# Altium PCB S52最小系统.PcbDoc (part 6 of 9)
Units mm, origin at the board's own origin, x right, y up, seen from the top; angles counter-clockwise.
Board outline 152.4 x 101.6 mm, 2 copper layers (Top Layer, Bottom Layer); 29 components, 53 nets, 176 pads, 2 vias.
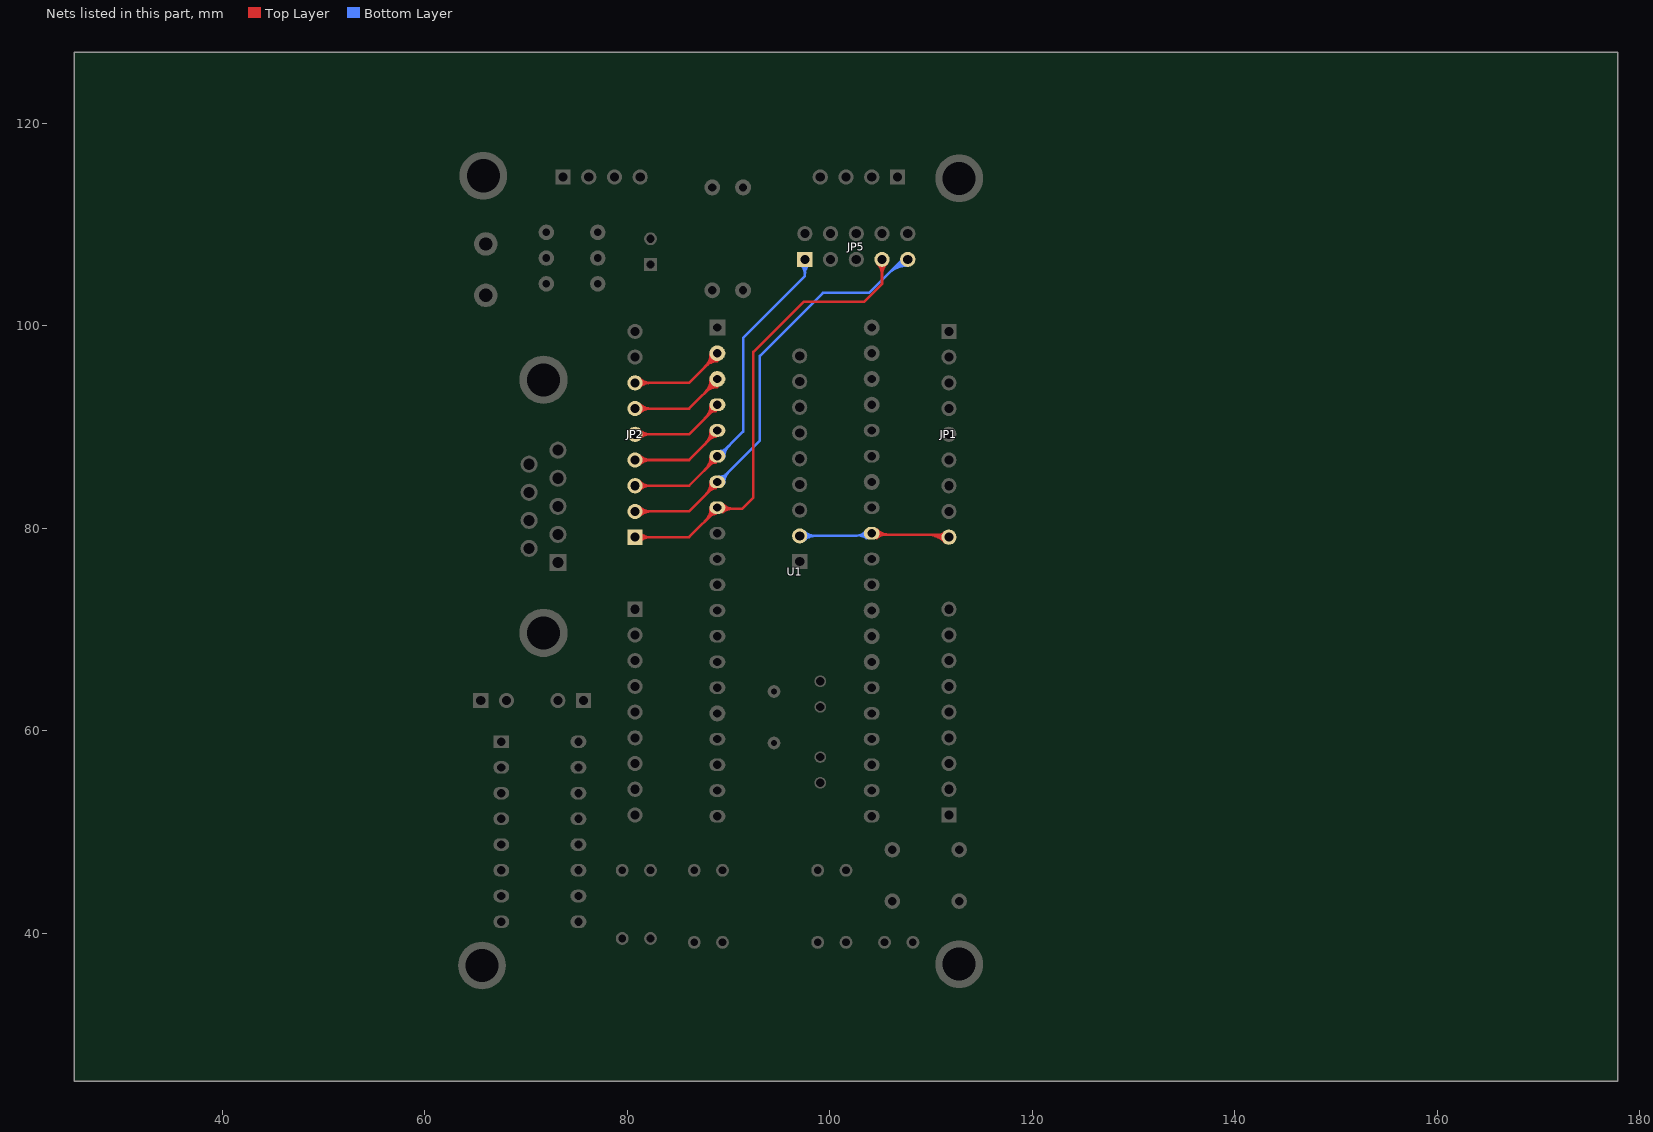
[diagram p6: the nets of this part, all layers, seen from the top]

## Via types
v1: diameter 1.27, hole 0.711, Top Layer to Bottom Layer, 2 vias

## Nets (pads, with @x,y where several pads share a name; then routed paths per layer and width w, separated by ;. In a path a pad name is that pad's centre, name@x,y a point inside that pad or via, vN(x,y) a via of type N, cw(c..) or ccw(c..) an arc to the next point about the centre after c; other vN are vias at no path point) (continued)
NetJP1_9: ?.2 JP1.9 U1.32 | length 99.6
  Top Layer w0.254: U1.32@104.136,79.374 111.507,79.374 JP1.9@111.76,79.121 ; U1.32@104.471,79.674 ccw(c105.194,80.397) 105.194,79.374 ; U1.32@104.471,79.674 ccw(c105.194,80.397) 105.194,79.374 ; U1.32@104.471,79.674 ccw(c105.194,80.397) 105.194,79.374 ; U1.32@104.471,79.674 ccw(c105.194,80.397) 105.194,79.374 ; U1.32@104.651,79.022 cw(c105.501,78.172) 105.501,79.374 ; U1.32@104.651,79.022 cw(c105.501,78.172) 105.501,79.374 ; U1.32@104.651,79.022 cw(c105.501,78.172) 105.501,79.374 ; U1.32@104.651,79.022 cw(c105.501,78.172) 105.501,79.374 ; U1.32@104.651,79.022 cw(c105.501,78.172) 105.501,79.374 ; U1.32@104.651,79.022 cw(c105.501,78.172) 105.501,79.374 ; U1.32@104.651,79.149 cw(c105.194,78.605) 105.194,79.374 ; U1.32@104.651,79.149 cw(c105.194,78.605) 105.194,79.374 ; U1.32@104.651,79.149 cw(c105.194,78.605) 105.194,79.374 ; U1.32@104.651,79.149 cw(c105.194,78.605) 105.194,79.374 ; U1.32@104.651,79.726 ccw(c105.501,80.576) 105.501,79.374 ; U1.32@104.651,79.726 ccw(c105.501,80.576) 105.501,79.374 ; U1.32@104.651,79.726 ccw(c105.501,80.576) 105.501,79.374 ; U1.32@104.651,79.726 ccw(c105.501,80.576) 105.501,79.374 ; U1.32@104.651,79.726 ccw(c105.501,80.576) 105.501,79.374 ; U1.32@104.651,79.726 ccw(c105.501,80.576) 105.501,79.374 ; U1.32@104.651,79.853 ccw(c105.807,81.01) 105.807,79.374 ; U1.32@104.651,79.853 ccw(c105.807,81.01) 105.807,79.374 ; U1.32@104.651,79.853 ccw(c105.807,81.01) 105.807,79.374 ; U1.32@104.651,79.853 ccw(c105.807,81.01) 105.807,79.374 ; 109.645,79.374 cw(c109.645,77.006) JP1.9@111.319,78.68 ; 109.645,79.374 cw(c109.645,77.006) JP1.9@111.319,78.68 ; 109.645,79.374 cw(c109.645,77.006) JP1.9@111.319,78.68 ; 109.645,79.374 cw(c109.645,77.006) JP1.9@111.319,78.68 ; 109.645,79.374 cw(c109.645,77.006) JP1.9@111.319,78.68 ; 109.645,79.374 cw(c109.645,77.006) JP1.9@111.319,78.68 ; 109.645,79.374 cw(c109.645,77.006) JP1.9@111.319,78.68 ; 109.645,79.374 cw(c109.645,77.006) JP1.9@111.319,78.68 ; 109.645,79.374 cw(c109.645,77.006) JP1.9@111.319,78.68 ; 109.645,79.374 cw(c109.645,77.006) JP1.9@111.319,78.68 ; 110.258,79.374 cw(c110.258,77.619) JP1.9@111.499,78.86 ; 110.258,79.374 cw(c110.258,77.619) JP1.9@111.499,78.86 ; 110.258,79.374 cw(c110.258,77.619) JP1.9@111.499,78.86 ; 110.258,79.374 cw(c110.258,77.619) JP1.9@111.499,78.86 ; 110.258,79.374 cw(c110.258,77.619) JP1.9@111.499,78.86 ; 110.258,79.374 cw(c110.258,77.619) JP1.9@111.499,78.86 ; 110.258,79.374 cw(c110.258,77.619) JP1.9@111.499,78.86 ; 110.258,79.374 cw(c110.258,77.619) JP1.9@111.499,78.86 ; 110.258,79.374 cw(c110.258,77.619) JP1.9@111.499,78.86 ; 110.258,79.374 cw(c110.258,77.619) JP1.9@111.499,78.86 ; 110.867,79.374 ccw(c110.867,80.014) JP1.9@111.319,79.562 ; 110.867,79.374 ccw(c110.867,80.014) JP1.9@111.319,79.562 ; 110.867,79.374 ccw(c110.867,80.014) JP1.9@111.319,79.562 ; 110.867,79.374 ccw(c110.867,80.014) JP1.9@111.319,79.562 ; 110.867,79.374 ccw(c110.867,80.014) JP1.9@111.319,79.562 ; 110.867,79.374 ccw(c110.867,80.014) JP1.9@111.319,79.562 ; 110.867,79.374 ccw(c110.867,80.014) JP1.9@111.319,79.562 ; 110.867,79.374 ccw(c110.867,80.014) JP1.9@111.319,79.562 ; 110.867,79.374 ccw(c110.867,80.014) JP1.9@111.319,79.562 ; 110.867,79.374 ccw(c110.867,80.014) JP1.9@111.319,79.562 ; 110.872,79.374 cw(c110.872,78.233) JP1.9@111.679,79.04 ; 110.872,79.374 cw(c110.872,78.233) JP1.9@111.679,79.04 ; 110.872,79.374 cw(c110.872,78.233) JP1.9@111.679,79.04 ; 110.872,79.374 cw(c110.872,78.233) JP1.9@111.679,79.04 ; 110.872,79.374 cw(c110.872,78.233) JP1.9@111.679,79.04 ; 110.872,79.374 cw(c110.872,78.233) JP1.9@111.679,79.04 ; 110.872,79.374 cw(c110.872,78.233) JP1.9@111.679,79.04 ; 110.872,79.374 cw(c110.872,78.233) JP1.9@111.679,79.04 ; 110.872,79.374 cw(c110.872,78.233) JP1.9@111.679,79.04 ; 110.872,79.374 cw(c110.872,78.233) JP1.9@111.679,79.04
  Bottom Layer w0.254: ?.2@97.028,79.248 102.467,79.248 ccw(c102.467,80.881) U1.32@103.622,79.726 ; 103.076,79.248 cw(c103.076,78.476) U1.32@103.622,79.022 ; 103.08,79.248 ccw(c103.08,80.267) U1.32@103.801,79.547 ; U1.32@104.01,79.248 U1.32@104.136,79.374 ; ?.2@97.289,78.987 cw(c97.919,78.357) 97.919,79.248 ; ?.2@97.289,78.987 cw(c97.919,78.357) 97.919,79.248 ; ?.2@97.289,78.987 cw(c97.919,78.357) 97.919,79.248 ; ?.2@97.289,78.987 cw(c97.919,78.357) 97.919,79.248 ; ?.2@97.289,79.509 ccw(c97.919,80.139) 97.919,79.248 ; ?.2@97.289,79.509 ccw(c97.919,80.139) 97.919,79.248 ; ?.2@97.289,79.509 ccw(c97.919,80.139) 97.919,79.248 ; ?.2@97.289,79.509 ccw(c97.919,80.139) 97.919,79.248 ; ?.2@97.469,78.807 cw(c98.532,77.744) 98.532,79.248 ; ?.2@97.469,78.807 cw(c98.532,77.744) 98.532,79.248 ; ?.2@97.469,78.807 cw(c98.532,77.744) 98.532,79.248 ; ?.2@97.469,78.807 cw(c98.532,77.744) 98.532,79.248 ; ?.2@97.469,79.689 ccw(c98.532,80.752) 98.532,79.248 ; ?.2@97.469,79.689 ccw(c98.532,80.752) 98.532,79.248 ; ?.2@97.469,79.689 ccw(c98.532,80.752) 98.532,79.248 ; ?.2@97.469,79.689 ccw(c98.532,80.752) 98.532,79.248
NetJP2_1: JP2.1 JP5.7 U1.8 | length 152.6
  Top Layer w0.254: JP2.1@80.772,79.121 86.103,79.121 88.896,81.914 91.312,81.914 92.456,83.058 92.456,97.409 97.409,102.362 103.378,102.362 105.156,104.14 JP5.7@105.156,106.553 ; JP2.1@81.033,78.86 cw(c81.663,78.23) 81.663,79.121 ; JP2.1@81.033,78.86 cw(c81.663,78.23) 81.663,79.121 ; JP2.1@81.033,78.86 cw(c81.663,78.23) 81.663,79.121 ; JP2.1@81.033,78.86 cw(c81.663,78.23) 81.663,79.121 ; JP2.1@81.033,78.86 cw(c81.663,78.23) 81.663,79.121 ; JP2.1@81.033,78.86 cw(c81.663,78.23) 81.663,79.121 ; JP2.1@81.033,78.86 cw(c81.663,78.23) 81.663,79.121 ; JP2.1@81.033,78.86 cw(c81.663,78.23) 81.663,79.121 ; JP2.1@81.033,78.86 cw(c81.663,78.23) 81.663,79.121 ; JP2.1@81.033,78.86 cw(c81.663,78.23) 81.663,79.121 ; JP2.1@81.033,79.382 ccw(c81.663,80.012) 81.663,79.121 ; JP2.1@81.033,79.382 ccw(c81.663,80.012) 81.663,79.121 ; JP2.1@81.033,79.382 ccw(c81.663,80.012) 81.663,79.121 ; JP2.1@81.033,79.382 ccw(c81.663,80.012) 81.663,79.121 ; JP2.1@81.033,79.382 ccw(c81.663,80.012) 81.663,79.121 ; JP2.1@81.033,79.382 ccw(c81.663,80.012) 81.663,79.121 ; JP2.1@81.033,79.382 ccw(c81.663,80.012) 81.663,79.121 ; JP2.1@81.033,79.382 ccw(c81.663,80.012) 81.663,79.121 ; JP2.1@81.033,79.382 ccw(c81.663,80.012) 81.663,79.121 ; JP2.1@81.033,79.382 ccw(c81.663,80.012) 81.663,79.121 ; JP2.1@81.213,78.68 cw(c82.276,77.617) 82.276,79.121 ; JP2.1@81.213,78.68 cw(c82.276,77.617) 82.276,79.121 ; JP2.1@81.213,78.68 cw(c82.276,77.617) 82.276,79.121 ; JP2.1@81.213,78.68 cw(c82.276,77.617) 82.276,79.121 ; JP2.1@81.213,78.68 cw(c82.276,77.617) 82.276,79.121 ; JP2.1@81.213,78.68 cw(c82.276,77.617) 82.276,79.121 ; JP2.1@81.213,78.68 cw(c82.276,77.617) 82.276,79.121 ; JP2.1@81.213,78.68 cw(c82.276,77.617) 82.276,79.121 ; JP2.1@81.213,78.68 cw(c82.276,77.617) 82.276,79.121 ; JP2.1@81.213,78.68 cw(c82.276,77.617) 82.276,79.121 ; JP2.1@81.213,79.562 ccw(c82.276,80.625) 82.276,79.121 ; JP2.1@81.213,79.562 ccw(c82.276,80.625) 82.276,79.121 ; JP2.1@81.213,79.562 ccw(c82.276,80.625) 82.276,79.121 ; JP2.1@81.213,79.562 ccw(c82.276,80.625) 82.276,79.121 ; JP2.1@81.213,79.562 ccw(c82.276,80.625) 82.276,79.121 ; JP2.1@81.213,79.562 ccw(c82.276,80.625) 82.276,79.121 ; JP2.1@81.213,79.562 ccw(c82.276,80.625) 82.276,79.121 ; JP2.1@81.213,79.562 ccw(c82.276,80.625) 82.276,79.121 ; JP2.1@81.213,79.562 ccw(c82.276,80.625) 82.276,79.121 ; JP2.1@81.213,79.562 ccw(c82.276,80.625) 82.276,79.121 ; 87.679,80.697 ccw(c86.335,82.041) U1.8@88.236,82.041 ; 87.679,80.697 ccw(c86.335,82.041) U1.8@88.236,82.041 ; 87.679,80.697 ccw(c86.335,82.041) U1.8@88.236,82.041 ; 87.679,80.697 ccw(c86.335,82.041) U1.8@88.236,82.041 ; 87.769,80.787 ccw(c86.641,81.914) U1.8@88.236,81.914 ; 87.769,80.787 ccw(c86.641,81.914) U1.8@88.236,81.914 ; 87.769,80.787 ccw(c86.641,81.914) U1.8@88.236,81.914 ; 87.769,80.787 ccw(c86.641,81.914) U1.8@88.236,81.914 ; 87.769,80.787 ccw(c86.641,81.914) U1.8@88.236,81.914 ; 87.769,80.787 ccw(c86.641,81.914) U1.8@88.236,81.914 ; 88.113,81.13 ccw(c87.202,82.041) U1.8@88.49,82.041 ; 88.113,81.13 ccw(c87.202,82.041) U1.8@88.49,82.041 ; 88.113,81.13 ccw(c87.202,82.041) U1.8@88.49,82.041 ; 88.113,81.13 ccw(c87.202,82.041) U1.8@88.49,82.041 ; 88.161,81.179 cw(c88.734,80.606) U1.8@88.734,81.416 ; 88.161,81.179 cw(c88.734,80.606) U1.8@88.734,81.416 ; 88.161,81.179 cw(c88.734,80.606) U1.8@88.734,81.416 ; 88.161,81.179 cw(c88.734,80.606) U1.8@88.734,81.416 ; 88.161,81.179 cw(c88.734,80.606) U1.8@88.734,81.416 ; 88.161,81.179 cw(c88.734,80.606) U1.8@88.734,81.416 ; 88.202,81.22 ccw(c87.509,81.914) U1.8@88.49,81.914 ; 88.202,81.22 ccw(c87.509,81.914) U1.8@88.49,81.914 ; 88.202,81.22 ccw(c87.509,81.914) U1.8@88.49,81.914 ; 88.202,81.22 ccw(c87.509,81.914) U1.8@88.49,81.914 ; 88.202,81.22 ccw(c87.509,81.914) U1.8@88.49,81.914 ; 88.202,81.22 ccw(c87.509,81.914) U1.8@88.49,81.914 ; 88.378,81.395 cw(c88.734,81.039) U1.8@88.734,81.543 ; 88.378,81.395 cw(c88.734,81.039) U1.8@88.734,81.543 ; 88.378,81.395 cw(c88.734,81.039) U1.8@88.734,81.543 ; 88.378,81.395 cw(c88.734,81.039) U1.8@88.734,81.543 ; U1.8@89.231,82.214 ccw(c89.954,82.937) 89.954,81.914 ; U1.8@89.231,82.214 ccw(c89.954,82.937) 89.954,81.914 ; U1.8@89.231,82.214 ccw(c89.954,82.937) 89.954,81.914 ; U1.8@89.231,82.214 ccw(c89.954,82.937) 89.954,81.914 ; U1.8@89.411,81.562 cw(c90.261,80.712) 90.261,81.914 ; U1.8@89.411,81.562 cw(c90.261,80.712) 90.261,81.914 ; U1.8@89.411,81.562 cw(c90.261,80.712) 90.261,81.914 ; U1.8@89.411,81.562 cw(c90.261,80.712) 90.261,81.914 ; U1.8@89.411,81.562 cw(c90.261,80.712) 90.261,81.914 ; U1.8@89.411,81.562 cw(c90.261,80.712) 90.261,81.914 ; U1.8@89.411,81.689 cw(c89.954,81.145) 89.954,81.914 ; U1.8@89.411,81.689 cw(c89.954,81.145) 89.954,81.914 ; U1.8@89.411,81.689 cw(c89.954,81.145) 89.954,81.914 ; U1.8@89.411,81.689 cw(c89.954,81.145) 89.954,81.914 ; U1.8@89.411,82.266 ccw(c90.261,83.116) 90.261,81.914 ; U1.8@89.411,82.266 ccw(c90.261,83.116) 90.261,81.914 ; U1.8@89.411,82.266 ccw(c90.261,83.116) 90.261,81.914 ; U1.8@89.411,82.266 ccw(c90.261,83.116) 90.261,81.914 ; U1.8@89.411,82.266 ccw(c90.261,83.116) 90.261,81.914 ; U1.8@89.411,82.266 ccw(c90.261,83.116) 90.261,81.914 ; U1.8@89.411,82.393 ccw(c90.567,83.55) 90.567,81.914 ; U1.8@89.411,82.393 ccw(c90.567,83.55) 90.567,81.914 ; U1.8@89.411,82.393 ccw(c90.567,83.55) 90.567,81.914 ; U1.8@89.411,82.393 ccw(c90.567,83.55) 90.567,81.914 ; JP5.7@104.715,106.112 cw(c103.652,105.049) 105.156,105.049 ; JP5.7@104.715,106.112 cw(c103.652,105.049) 105.156,105.049 ; JP5.7@104.715,106.112 cw(c103.652,105.049) 105.156,105.049 ; JP5.7@104.715,106.112 cw(c103.652,105.049) 105.156,105.049 ; JP5.7@104.895,106.292 cw(c104.265,105.662) 105.156,105.662 ; JP5.7@104.895,106.292 cw(c104.265,105.662) 105.156,105.662 ; JP5.7@104.895,106.292 cw(c104.265,105.662) 105.156,105.662 ; JP5.7@104.895,106.292 cw(c104.265,105.662) 105.156,105.662 ; JP5.7@104.943,105.967 cw(c104.833,105.664) 105.156,105.664 ; JP5.7@104.943,105.967 cw(c104.833,105.664) 105.156,105.664 ; JP5.7@104.943,105.967 cw(c104.833,105.664) 105.156,105.664 ; JP5.7@104.943,105.967 cw(c104.833,105.664) 105.156,105.664 ; JP5.7@104.943,105.967 cw(c104.833,105.664) 105.156,105.664 ; JP5.7@104.943,105.967 cw(c104.833,105.664) 105.156,105.664 ; 105.156,105.049 cw(c106.66,105.049) JP5.7@105.597,106.112 ; 105.156,105.049 cw(c106.66,105.049) JP5.7@105.597,106.112 ; 105.156,105.049 cw(c106.66,105.049) JP5.7@105.597,106.112 ; 105.156,105.049 cw(c106.66,105.049) JP5.7@105.597,106.112 ; 105.156,105.662 cw(c106.047,105.662) JP5.7@105.417,106.292 ; 105.156,105.662 cw(c106.047,105.662) JP5.7@105.417,106.292 ; 105.156,105.662 cw(c106.047,105.662) JP5.7@105.417,106.292 ; 105.156,105.662 cw(c106.047,105.662) JP5.7@105.417,106.292 ; 105.156,105.664 cw(c105.479,105.664) JP5.7@105.369,105.967 ; 105.156,105.664 cw(c105.479,105.664) JP5.7@105.369,105.967 ; 105.156,105.664 cw(c105.479,105.664) JP5.7@105.369,105.967 ; 105.156,105.664 cw(c105.479,105.664) JP5.7@105.369,105.967 ; 105.156,105.664 cw(c105.479,105.664) JP5.7@105.369,105.967 ; 105.156,105.664 cw(c105.479,105.664) JP5.7@105.369,105.967
NetJP2_2: JP2.2 JP5.9 U1.7 | length 182.8
  Top Layer w0.254: JP2.2@80.772,81.661 86.103,81.661 U1.7@88.896,84.454 ; JP2.2@81.033,81.4 cw(c81.663,80.77) 81.663,81.661 ; JP2.2@81.033,81.4 cw(c81.663,80.77) 81.663,81.661 ; JP2.2@81.033,81.4 cw(c81.663,80.77) 81.663,81.661 ; JP2.2@81.033,81.4 cw(c81.663,80.77) 81.663,81.661 ; JP2.2@81.033,81.4 cw(c81.663,80.77) 81.663,81.661 ; JP2.2@81.033,81.4 cw(c81.663,80.77) 81.663,81.661 ; JP2.2@81.033,81.4 cw(c81.663,80.77) 81.663,81.661 ; JP2.2@81.033,81.4 cw(c81.663,80.77) 81.663,81.661 ; JP2.2@81.033,81.4 cw(c81.663,80.77) 81.663,81.661 ; JP2.2@81.033,81.4 cw(c81.663,80.77) 81.663,81.661 ; JP2.2@81.033,81.922 ccw(c81.663,82.552) 81.663,81.661 ; JP2.2@81.033,81.922 ccw(c81.663,82.552) 81.663,81.661 ; JP2.2@81.033,81.922 ccw(c81.663,82.552) 81.663,81.661 ; JP2.2@81.033,81.922 ccw(c81.663,82.552) 81.663,81.661 ; JP2.2@81.033,81.922 ccw(c81.663,82.552) 81.663,81.661 ; JP2.2@81.033,81.922 ccw(c81.663,82.552) 81.663,81.661 ; JP2.2@81.033,81.922 ccw(c81.663,82.552) 81.663,81.661 ; JP2.2@81.033,81.922 ccw(c81.663,82.552) 81.663,81.661 ; JP2.2@81.033,81.922 ccw(c81.663,82.552) 81.663,81.661 ; JP2.2@81.033,81.922 ccw(c81.663,82.552) 81.663,81.661 ; JP2.2@81.213,81.22 cw(c82.276,80.157) 82.276,81.661 ; JP2.2@81.213,81.22 cw(c82.276,80.157) 82.276,81.661 ; JP2.2@81.213,81.22 cw(c82.276,80.157) 82.276,81.661 ; JP2.2@81.213,81.22 cw(c82.276,80.157) 82.276,81.661 ; JP2.2@81.213,81.22 cw(c82.276,80.157) 82.276,81.661 ; JP2.2@81.213,81.22 cw(c82.276,80.157) 82.276,81.661 ; JP2.2@81.213,81.22 cw(c82.276,80.157) 82.276,81.661 ; JP2.2@81.213,81.22 cw(c82.276,80.157) 82.276,81.661 ; JP2.2@81.213,81.22 cw(c82.276,80.157) 82.276,81.661 ; JP2.2@81.213,81.22 cw(c82.276,80.157) 82.276,81.661 ; JP2.2@81.213,82.102 ccw(c82.276,83.165) 82.276,81.661 ; JP2.2@81.213,82.102 ccw(c82.276,83.165) 82.276,81.661 ; JP2.2@81.213,82.102 ccw(c82.276,83.165) 82.276,81.661 ; JP2.2@81.213,82.102 ccw(c82.276,83.165) 82.276,81.661 ; JP2.2@81.213,82.102 ccw(c82.276,83.165) 82.276,81.661 ; JP2.2@81.213,82.102 ccw(c82.276,83.165) 82.276,81.661 ; JP2.2@81.213,82.102 ccw(c82.276,83.165) 82.276,81.661 ; JP2.2@81.213,82.102 ccw(c82.276,83.165) 82.276,81.661 ; JP2.2@81.213,82.102 ccw(c82.276,83.165) 82.276,81.661 ; JP2.2@81.213,82.102 ccw(c82.276,83.165) 82.276,81.661 ; 87.679,83.237 ccw(c86.335,84.581) U1.7@88.236,84.581 ; 87.679,83.237 ccw(c86.335,84.581) U1.7@88.236,84.581 ; 87.679,83.237 ccw(c86.335,84.581) U1.7@88.236,84.581 ; 87.679,83.237 ccw(c86.335,84.581) U1.7@88.236,84.581 ; 87.769,83.327 ccw(c86.641,84.454) U1.7@88.236,84.454 ; 87.769,83.327 ccw(c86.641,84.454) U1.7@88.236,84.454 ; 87.769,83.327 ccw(c86.641,84.454) U1.7@88.236,84.454 ; 87.769,83.327 ccw(c86.641,84.454) U1.7@88.236,84.454 ; 87.769,83.327 ccw(c86.641,84.454) U1.7@88.236,84.454 ; 87.769,83.327 ccw(c86.641,84.454) U1.7@88.236,84.454 ; 88.113,83.67 ccw(c87.202,84.581) U1.7@88.49,84.581 ; 88.113,83.67 ccw(c87.202,84.581) U1.7@88.49,84.581 ; 88.113,83.67 ccw(c87.202,84.581) U1.7@88.49,84.581 ; 88.113,83.67 ccw(c87.202,84.581) U1.7@88.49,84.581 ; 88.161,83.719 cw(c88.734,83.146) U1.7@88.734,83.956 ; 88.161,83.719 cw(c88.734,83.146) U1.7@88.734,83.956 ; 88.161,83.719 cw(c88.734,83.146) U1.7@88.734,83.956 ; 88.161,83.719 cw(c88.734,83.146) U1.7@88.734,83.956 ; 88.161,83.719 cw(c88.734,83.146) U1.7@88.734,83.956 ; 88.161,83.719 cw(c88.734,83.146) U1.7@88.734,83.956 ; 88.202,83.76 ccw(c87.509,84.454) U1.7@88.49,84.454 ; 88.202,83.76 ccw(c87.509,84.454) U1.7@88.49,84.454 ; 88.202,83.76 ccw(c87.509,84.454) U1.7@88.49,84.454 ; 88.202,83.76 ccw(c87.509,84.454) U1.7@88.49,84.454 ; 88.202,83.76 ccw(c87.509,84.454) U1.7@88.49,84.454 ; 88.202,83.76 ccw(c87.509,84.454) U1.7@88.49,84.454 ; 88.378,83.935 cw(c88.734,83.579) U1.7@88.734,84.083 ; 88.378,83.935 cw(c88.734,83.579) U1.7@88.734,84.083 ; 88.378,83.935 cw(c88.734,83.579) U1.7@88.734,84.083 ; 88.378,83.935 cw(c88.734,83.579) U1.7@88.734,84.083
  Bottom Layer w0.254: U1.7@88.896,84.454 93.091,88.649 93.091,97.028 99.314,103.251 103.886,103.251 107.188,106.553 JP5.9@107.696,106.553 ; U1.7@89.059,84.952 ccw(c89.059,85.762) 89.632,85.189 ; U1.7@89.059,84.952 ccw(c89.059,85.762) 89.632,85.189 ; U1.7@89.059,84.952 ccw(c89.059,85.762) 89.632,85.189 ; U1.7@89.059,84.952 ccw(c89.059,85.762) 89.632,85.189 ; U1.7@89.059,84.952 ccw(c89.059,85.762) 89.632,85.189 ; U1.7@89.059,84.952 ccw(c89.059,85.762) 89.632,85.189 ; U1.7@89.059,85.079 ccw(c89.059,86.196) 89.848,85.406 ; U1.7@89.059,85.079 ccw(c89.059,86.196) 89.848,85.406 ; U1.7@89.059,85.079 ccw(c89.059,86.196) 89.848,85.406 ; U1.7@89.059,85.079 ccw(c89.059,86.196) 89.848,85.406 ; U1.7@89.303,84.454 cw(c90.284,84.454) 89.59,85.148 ; U1.7@89.303,84.454 cw(c90.284,84.454) 89.59,85.148 ; U1.7@89.303,84.454 cw(c90.284,84.454) 89.59,85.148 ; U1.7@89.303,84.454 cw(c90.284,84.454) 89.59,85.148 ; U1.7@89.303,84.454 cw(c90.284,84.454) 89.59,85.148 ; U1.7@89.303,84.454 cw(c90.284,84.454) 89.59,85.148 ; U1.7@89.303,84.581 cw(c89.977,84.581) 89.5,85.058 ; U1.7@89.303,84.581 cw(c89.977,84.581) 89.5,85.058 ; U1.7@89.303,84.581 cw(c89.977,84.581) 89.5,85.058 ; U1.7@89.303,84.581 cw(c89.977,84.581) 89.5,85.058 ; U1.7@89.557,84.454 cw(c91.151,84.454) 90.024,85.581 ; U1.7@89.557,84.454 cw(c91.151,84.454) 90.024,85.581 ; U1.7@89.557,84.454 cw(c91.151,84.454) 90.024,85.581 ; U1.7@89.557,84.454 cw(c91.151,84.454) 90.024,85.581 ; U1.7@89.557,84.454 cw(c91.151,84.454) 90.024,85.581 ; U1.7@89.557,84.454 cw(c91.151,84.454) 90.024,85.581 ; U1.7@89.557,84.581 cw(c90.844,84.581) 89.934,85.492 ; U1.7@89.557,84.581 cw(c90.844,84.581) 89.934,85.492 ; U1.7@89.557,84.581 cw(c90.844,84.581) 89.934,85.492 ; U1.7@89.557,84.581 cw(c90.844,84.581) 89.934,85.492 ; 105.765,105.13 cw(c107.696,103.2) JP5.9@107.696,105.93 ; 105.765,105.13 cw(c107.696,103.2) JP5.9@107.696,105.93 ; 105.765,105.13 cw(c107.696,103.2) JP5.9@107.696,105.93 ; 105.765,105.13 cw(c107.696,103.2) JP5.9@107.696,105.93 ; 105.765,105.13 cw(c107.696,103.2) JP5.9@107.696,105.93 ; 105.765,105.13 cw(c107.696,103.2) JP5.9@107.696,105.93 ; 105.765,105.13 cw(c107.696,103.2) JP5.9@107.696,105.93 ; 105.765,105.13 cw(c107.696,103.2) JP5.9@107.696,105.93 ; 105.765,105.13 cw(c107.696,103.2) JP5.9@107.696,105.93 ; 105.765,105.13 cw(c107.696,103.2) JP5.9@107.696,105.93 ; 106.199,105.564 cw(c107.696,104.067) JP5.9@107.696,106.184 ; 106.199,105.564 cw(c107.696,104.067) JP5.9@107.696,106.184 ; 106.199,105.564 cw(c107.696,104.067) JP5.9@107.696,106.184 ; 106.199,105.564 cw(c107.696,104.067) JP5.9@107.696,106.184 ; 106.199,105.564 cw(c107.696,104.067) JP5.9@107.696,106.184 ; 106.199,105.564 cw(c107.696,104.067) JP5.9@107.696,106.184 ; 106.199,105.564 cw(c107.696,104.067) JP5.9@107.696,106.184 ; 106.199,105.564 cw(c107.696,104.067) JP5.9@107.696,106.184 ; 106.199,105.564 cw(c107.696,104.067) JP5.9@107.696,106.184 ; 106.199,105.564 cw(c107.696,104.067) JP5.9@107.696,106.184 ; 106.632,105.997 cw(c107.696,104.934) JP5.9@107.696,106.438 ; 106.632,105.997 cw(c107.696,104.934) JP5.9@107.696,106.438 ; 106.632,105.997 cw(c107.696,104.934) JP5.9@107.696,106.438 ; 106.632,105.997 cw(c107.696,104.934) JP5.9@107.696,106.438 ; 106.632,105.997 cw(c107.696,104.934) JP5.9@107.696,106.438 ; 106.632,105.997 cw(c107.696,104.934) JP5.9@107.696,106.438 ; 106.632,105.997 cw(c107.696,104.934) JP5.9@107.696,106.438 ; 106.632,105.997 cw(c107.696,104.934) JP5.9@107.696,106.438 ; 106.632,105.997 cw(c107.696,104.934) JP5.9@107.696,106.438 ; 106.632,105.997 cw(c107.696,104.934) JP5.9@107.696,106.438
NetJP2_3: JP2.3 JP5.1 U1.6 | length 160.8
  Top Layer w0.254: JP2.3@80.772,84.201 86.103,84.201 U1.6@88.896,86.994 ; JP2.3@81.033,83.94 cw(c81.663,83.31) 81.663,84.201 ; JP2.3@81.033,83.94 cw(c81.663,83.31) 81.663,84.201 ; JP2.3@81.033,83.94 cw(c81.663,83.31) 81.663,84.201 ; JP2.3@81.033,83.94 cw(c81.663,83.31) 81.663,84.201 ; JP2.3@81.033,83.94 cw(c81.663,83.31) 81.663,84.201 ; JP2.3@81.033,83.94 cw(c81.663,83.31) 81.663,84.201 ; JP2.3@81.033,83.94 cw(c81.663,83.31) 81.663,84.201 ; JP2.3@81.033,83.94 cw(c81.663,83.31) 81.663,84.201 ; JP2.3@81.033,83.94 cw(c81.663,83.31) 81.663,84.201 ; JP2.3@81.033,83.94 cw(c81.663,83.31) 81.663,84.201 ; JP2.3@81.033,84.462 ccw(c81.663,85.092) 81.663,84.201 ; JP2.3@81.033,84.462 ccw(c81.663,85.092) 81.663,84.201 ; JP2.3@81.033,84.462 ccw(c81.663,85.092) 81.663,84.201 ; JP2.3@81.033,84.462 ccw(c81.663,85.092) 81.663,84.201 ; JP2.3@81.033,84.462 ccw(c81.663,85.092) 81.663,84.201 ; JP2.3@81.033,84.462 ccw(c81.663,85.092) 81.663,84.201 ; JP2.3@81.033,84.462 ccw(c81.663,85.092) 81.663,84.201 ; JP2.3@81.033,84.462 ccw(c81.663,85.092) 81.663,84.201 ; JP2.3@81.033,84.462 ccw(c81.663,85.092) 81.663,84.201 ; JP2.3@81.033,84.462 ccw(c81.663,85.092) 81.663,84.201 ; JP2.3@81.213,83.76 cw(c82.276,82.697) 82.276,84.201 ; JP2.3@81.213,83.76 cw(c82.276,82.697) 82.276,84.201 ; JP2.3@81.213,83.76 cw(c82.276,82.697) 82.276,84.201 ; JP2.3@81.213,83.76 cw(c82.276,82.697) 82.276,84.201 ; JP2.3@81.213,83.76 cw(c82.276,82.697) 82.276,84.201 ; JP2.3@81.213,83.76 cw(c82.276,82.697) 82.276,84.201 ; JP2.3@81.213,83.76 cw(c82.276,82.697) 82.276,84.201 ; JP2.3@81.213,83.76 cw(c82.276,82.697) 82.276,84.201 ; JP2.3@81.213,83.76 cw(c82.276,82.697) 82.276,84.201 ; JP2.3@81.213,83.76 cw(c82.276,82.697) 82.276,84.201 ; JP2.3@81.213,84.642 ccw(c82.276,85.705) 82.276,84.201 ; JP2.3@81.213,84.642 ccw(c82.276,85.705) 82.276,84.201 ; JP2.3@81.213,84.642 ccw(c82.276,85.705) 82.276,84.201 ; JP2.3@81.213,84.642 ccw(c82.276,85.705) 82.276,84.201 ; JP2.3@81.213,84.642 ccw(c82.276,85.705) 82.276,84.201 ; JP2.3@81.213,84.642 ccw(c82.276,85.705) 82.276,84.201 ; JP2.3@81.213,84.642 ccw(c82.276,85.705) 82.276,84.201 ; JP2.3@81.213,84.642 ccw(c82.276,85.705) 82.276,84.201 ; JP2.3@81.213,84.642 ccw(c82.276,85.705) 82.276,84.201 ; JP2.3@81.213,84.642 ccw(c82.276,85.705) 82.276,84.201 ; 87.679,85.777 ccw(c86.335,87.121) U1.6@88.236,87.121 ; 87.679,85.777 ccw(c86.335,87.121) U1.6@88.236,87.121 ; 87.679,85.777 ccw(c86.335,87.121) U1.6@88.236,87.121 ; 87.679,85.777 ccw(c86.335,87.121) U1.6@88.236,87.121 ; 87.769,85.867 ccw(c86.641,86.994) U1.6@88.236,86.994 ; 87.769,85.867 ccw(c86.641,86.994) U1.6@88.236,86.994 ; 87.769,85.867 ccw(c86.641,86.994) U1.6@88.236,86.994 ; 87.769,85.867 ccw(c86.641,86.994) U1.6@88.236,86.994 ; 87.769,85.867 ccw(c86.641,86.994) U1.6@88.236,86.994 ; 87.769,85.867 ccw(c86.641,86.994) U1.6@88.236,86.994 ; 88.113,86.21 ccw(c87.202,87.121) U1.6@88.49,87.121 ; 88.113,86.21 ccw(c87.202,87.121) U1.6@88.49,87.121 ; 88.113,86.21 ccw(c87.202,87.121) U1.6@88.49,87.121 ; 88.113,86.21 ccw(c87.202,87.121) U1.6@88.49,87.121 ; 88.161,86.259 cw(c88.734,85.686) U1.6@88.734,86.496 ; 88.161,86.259 cw(c88.734,85.686) U1.6@88.734,86.496 ; 88.161,86.259 cw(c88.734,85.686) U1.6@88.734,86.496 ; 88.161,86.259 cw(c88.734,85.686) U1.6@88.734,86.496 ; 88.161,86.259 cw(c88.734,85.686) U1.6@88.734,86.496 ; 88.161,86.259 cw(c88.734,85.686) U1.6@88.734,86.496 ; 88.202,86.3 ccw(c87.509,86.994) U1.6@88.49,86.994 ; 88.202,86.3 ccw(c87.509,86.994) U1.6@88.49,86.994 ; 88.202,86.3 ccw(c87.509,86.994) U1.6@88.49,86.994 ; 88.202,86.3 ccw(c87.509,86.994) U1.6@88.49,86.994 ; 88.202,86.3 ccw(c87.509,86.994) U1.6@88.49,86.994 ; 88.202,86.3 ccw(c87.509,86.994) U1.6@88.49,86.994 ; 88.378,86.475 cw(c88.734,86.119) U1.6@88.734,86.623 ; 88.378,86.475 cw(c88.734,86.119) U1.6@88.734,86.623 ; 88.378,86.475 cw(c88.734,86.119) U1.6@88.734,86.623 ; 88.378,86.475 cw(c88.734,86.119) U1.6@88.734,86.623
  Bottom Layer w0.254: U1.6@88.896,86.994 91.44,89.538 91.44,98.806 97.536,104.902 JP5.1@97.536,106.553 ; U1.6@89.059,87.492 ccw(c89.059,88.302) 89.632,87.729 ; U1.6@89.059,87.492 ccw(c89.059,88.302) 89.632,87.729 ; U1.6@89.059,87.492 ccw(c89.059,88.302) 89.632,87.729 ; U1.6@89.059,87.492 ccw(c89.059,88.302) 89.632,87.729 ; U1.6@89.059,87.492 ccw(c89.059,88.302) 89.632,87.729 ; U1.6@89.059,87.492 ccw(c89.059,88.302) 89.632,87.729 ; U1.6@89.059,87.619 ccw(c89.059,88.736) 89.848,87.946 ; U1.6@89.059,87.619 ccw(c89.059,88.736) 89.848,87.946 ; U1.6@89.059,87.619 ccw(c89.059,88.736) 89.848,87.946 ; U1.6@89.059,87.619 ccw(c89.059,88.736) 89.848,87.946 ; U1.6@89.303,86.994 cw(c90.284,86.994) 89.59,87.688 ; U1.6@89.303,86.994 cw(c90.284,86.994) 89.59,87.688 ; U1.6@89.303,86.994 cw(c90.284,86.994) 89.59,87.688 ; U1.6@89.303,86.994 cw(c90.284,86.994) 89.59,87.688 ; U1.6@89.303,86.994 cw(c90.284,86.994) 89.59,87.688 ; U1.6@89.303,86.994 cw(c90.284,86.994) 89.59,87.688 ; U1.6@89.303,87.121 cw(c89.977,87.121) 89.5,87.598 ; U1.6@89.303,87.121 cw(c89.977,87.121) 89.5,87.598 ; U1.6@89.303,87.121 cw(c89.977,87.121) 89.5,87.598 ; U1.6@89.303,87.121 cw(c89.977,87.121) 89.5,87.598 ; U1.6@89.557,86.994 cw(c91.151,86.994) 90.024,88.121 ; U1.6@89.557,86.994 cw(c91.151,86.994) 90.024,88.121 ; U1.6@89.557,86.994 cw(c91.151,86.994) 90.024,88.121 ; U1.6@89.557,86.994 cw(c91.151,86.994) 90.024,88.121 ; U1.6@89.557,86.994 cw(c91.151,86.994) 90.024,88.121 ; U1.6@89.557,86.994 cw(c91.151,86.994) 90.024,88.121 ; U1.6@89.557,87.121 cw(c90.844,87.121) 89.934,88.032 ; U1.6@89.557,87.121 cw(c90.844,87.121) 89.934,88.032 ; U1.6@89.557,87.121 cw(c90.844,87.121) 89.934,88.032 ; U1.6@89.557,87.121 cw(c90.844,87.121) 89.934,88.032 ; JP5.1@97.095,106.112 cw(c96.032,105.049) 97.536,105.049 ; JP5.1@97.095,106.112 cw(c96.032,105.049) 97.536,105.049 ; JP5.1@97.095,106.112 cw(c96.032,105.049) 97.536,105.049 ; JP5.1@97.095,106.112 cw(c96.032,105.049) 97.536,105.049 ; JP5.1@97.095,106.112 cw(c96.032,105.049) 97.536,105.049 ; JP5.1@97.095,106.112 cw(c96.032,105.049) 97.536,105.049 ; JP5.1@97.095,106.112 cw(c96.032,105.049) 97.536,105.049 ; JP5.1@97.095,106.112 cw(c96.032,105.049) 97.536,105.049 ; JP5.1@97.095,106.112 cw(c96.032,105.049) 97.536,105.049 ; JP5.1@97.095,106.112 cw(c96.032,105.049) 97.536,105.049 ; JP5.1@97.275,106.292 cw(c96.645,105.662) 97.536,105.662 ; JP5.1@97.275,106.292 cw(c96.645,105.662) 97.536,105.662 ; JP5.1@97.275,106.292 cw(c96.645,105.662) 97.536,105.662 ; JP5.1@97.275,106.292 cw(c96.645,105.662) 97.536,105.662 ; JP5.1@97.275,106.292 cw(c96.645,105.662) 97.536,105.662 ; JP5.1@97.275,106.292 cw(c96.645,105.662) 97.536,105.662 ; JP5.1@97.275,106.292 cw(c96.645,105.662) 97.536,105.662 ; JP5.1@97.275,106.292 cw(c96.645,105.662) 97.536,105.662 ; JP5.1@97.275,106.292 cw(c96.645,105.662) 97.536,105.662 ; JP5.1@97.275,106.292 cw(c96.645,105.662) 97.536,105.662 ; 97.536,105.049 cw(c99.04,105.049) JP5.1@97.977,106.112 ; 97.536,105.049 cw(c99.04,105.049) JP5.1@97.977,106.112 ; 97.536,105.049 cw(c99.04,105.049) JP5.1@97.977,106.112 ; 97.536,105.049 cw(c99.04,105.049) JP5.1@97.977,106.112 ; 97.536,105.049 cw(c99.04,105.049) JP5.1@97.977,106.112 ; 97.536,105.049 cw(c99.04,105.049) JP5.1@97.977,106.112 ; 97.536,105.049 cw(c99.04,105.049) JP5.1@97.977,106.112 ; 97.536,105.049 cw(c99.04,105.049) JP5.1@97.977,106.112 ; 97.536,105.049 cw(c99.04,105.049) JP5.1@97.977,106.112 ; 97.536,105.049 cw(c99.04,105.049) JP5.1@97.977,106.112 ; 97.536,105.662 cw(c98.427,105.662) JP5.1@97.797,106.292 ; 97.536,105.662 cw(c98.427,105.662) JP5.1@97.797,106.292 ; 97.536,105.662 cw(c98.427,105.662) JP5.1@97.797,106.292 ; 97.536,105.662 cw(c98.427,105.662) JP5.1@97.797,106.292 ; 97.536,105.662 cw(c98.427,105.662) JP5.1@97.797,106.292 ; 97.536,105.662 cw(c98.427,105.662) JP5.1@97.797,106.292 ; 97.536,105.662 cw(c98.427,105.662) JP5.1@97.797,106.292 ; 97.536,105.662 cw(c98.427,105.662) JP5.1@97.797,106.292 ; 97.536,105.662 cw(c98.427,105.662) JP5.1@97.797,106.292 ; 97.536,105.662 cw(c98.427,105.662) JP5.1@97.797,106.292
NetJP2_4: JP2.4 U1.5 | length 74.5
  Top Layer w0.254: JP2.4@80.772,86.741 86.103,86.741 U1.5@88.896,89.534 ; JP2.4@81.033,86.48 cw(c81.663,85.85) 81.663,86.741 ; JP2.4@81.033,86.48 cw(c81.663,85.85) 81.663,86.741 ; JP2.4@81.033,86.48 cw(c81.663,85.85) 81.663,86.741 ; JP2.4@81.033,86.48 cw(c81.663,85.85) 81.663,86.741 ; JP2.4@81.033,86.48 cw(c81.663,85.85) 81.663,86.741 ; JP2.4@81.033,86.48 cw(c81.663,85.85) 81.663,86.741 ; JP2.4@81.033,86.48 cw(c81.663,85.85) 81.663,86.741 ; JP2.4@81.033,86.48 cw(c81.663,85.85) 81.663,86.741 ; JP2.4@81.033,86.48 cw(c81.663,85.85) 81.663,86.741 ; JP2.4@81.033,86.48 cw(c81.663,85.85) 81.663,86.741 ; JP2.4@81.033,87.002 ccw(c81.663,87.632) 81.663,86.741 ; JP2.4@81.033,87.002 ccw(c81.663,87.632) 81.663,86.741 ; JP2.4@81.033,87.002 ccw(c81.663,87.632) 81.663,86.741 ; JP2.4@81.033,87.002 ccw(c81.663,87.632) 81.663,86.741 ; JP2.4@81.033,87.002 ccw(c81.663,87.632) 81.663,86.741 ; JP2.4@81.033,87.002 ccw(c81.663,87.632) 81.663,86.741 ; JP2.4@81.033,87.002 ccw(c81.663,87.632) 81.663,86.741 ; JP2.4@81.033,87.002 ccw(c81.663,87.632) 81.663,86.741 ; JP2.4@81.033,87.002 ccw(c81.663,87.632) 81.663,86.741 ; JP2.4@81.033,87.002 ccw(c81.663,87.632) 81.663,86.741 ; JP2.4@81.213,86.3 cw(c82.276,85.237) 82.276,86.741 ; JP2.4@81.213,86.3 cw(c82.276,85.237) 82.276,86.741 ; JP2.4@81.213,86.3 cw(c82.276,85.237) 82.276,86.741 ; JP2.4@81.213,86.3 cw(c82.276,85.237) 82.276,86.741 ; JP2.4@81.213,86.3 cw(c82.276,85.237) 82.276,86.741 ; JP2.4@81.213,86.3 cw(c82.276,85.237) 82.276,86.741 ; JP2.4@81.213,86.3 cw(c82.276,85.237) 82.276,86.741 ; JP2.4@81.213,86.3 cw(c82.276,85.237) 82.276,86.741 ; JP2.4@81.213,86.3 cw(c82.276,85.237) 82.276,86.741 ; JP2.4@81.213,86.3 cw(c82.276,85.237) 82.276,86.741 ; JP2.4@81.213,87.182 ccw(c82.276,88.245) 82.276,86.741 ; JP2.4@81.213,87.182 ccw(c82.276,88.245) 82.276,86.741 ; JP2.4@81.213,87.182 ccw(c82.276,88.245) 82.276,86.741 ; JP2.4@81.213,87.182 ccw(c82.276,88.245) 82.276,86.741 ; JP2.4@81.213,87.182 ccw(c82.276,88.245) 82.276,86.741 ; JP2.4@81.213,87.182 ccw(c82.276,88.245) 82.276,86.741 ; JP2.4@81.213,87.182 ccw(c82.276,88.245) 82.276,86.741 ; JP2.4@81.213,87.182 ccw(c82.276,88.245) 82.276,86.741 ; JP2.4@81.213,87.182 ccw(c82.276,88.245) 82.276,86.741 ; JP2.4@81.213,87.182 ccw(c82.276,88.245) 82.276,86.741 ; 87.679,88.317 ccw(c86.335,89.661) U1.5@88.236,89.661 ; 87.679,88.317 ccw(c86.335,89.661) U1.5@88.236,89.661 ; 87.679,88.317 ccw(c86.335,89.661) U1.5@88.236,89.661 ; 87.679,88.317 ccw(c86.335,89.661) U1.5@88.236,89.661 ; 87.769,88.407 ccw(c86.641,89.534) U1.5@88.236,89.534 ; 87.769,88.407 ccw(c86.641,89.534) U1.5@88.236,89.534 ; 87.769,88.407 ccw(c86.641,89.534) U1.5@88.236,89.534 ; 87.769,88.407 ccw(c86.641,89.534) U1.5@88.236,89.534 ; 87.769,88.407 ccw(c86.641,89.534) U1.5@88.236,89.534 ; 87.769,88.407 ccw(c86.641,89.534) U1.5@88.236,89.534 ; 88.113,88.75 ccw(c87.202,89.661) U1.5@88.49,89.661 ; 88.113,88.75 ccw(c87.202,89.661) U1.5@88.49,89.661 ; 88.113,88.75 ccw(c87.202,89.661) U1.5@88.49,89.661 ; 88.113,88.75 ccw(c87.202,89.661) U1.5@88.49,89.661 ; 88.161,88.799 cw(c88.734,88.226) U1.5@88.734,89.036 ; 88.161,88.799 cw(c88.734,88.226) U1.5@88.734,89.036 ; 88.161,88.799 cw(c88.734,88.226) U1.5@88.734,89.036 ; 88.161,88.799 cw(c88.734,88.226) U1.5@88.734,89.036 ; 88.161,88.799 cw(c88.734,88.226) U1.5@88.734,89.036 ; 88.161,88.799 cw(c88.734,88.226) U1.5@88.734,89.036 ; 88.202,88.84 ccw(c87.509,89.534) U1.5@88.49,89.534 ; 88.202,88.84 ccw(c87.509,89.534) U1.5@88.49,89.534 ; 88.202,88.84 ccw(c87.509,89.534) U1.5@88.49,89.534 ; 88.202,88.84 ccw(c87.509,89.534) U1.5@88.49,89.534 ; 88.202,88.84 ccw(c87.509,89.534) U1.5@88.49,89.534 ; 88.202,88.84 ccw(c87.509,89.534) U1.5@88.49,89.534 ; 88.378,89.015 cw(c88.734,88.659) U1.5@88.734,89.163 ; 88.378,89.015 cw(c88.734,88.659) U1.5@88.734,89.163 ; 88.378,89.015 cw(c88.734,88.659) U1.5@88.734,89.163 ; 88.378,89.015 cw(c88.734,88.659) U1.5@88.734,89.163
NetJP2_5: JP2.5 U1.4 | length 74.5
  Top Layer w0.254: JP2.5@80.772,89.281 86.103,89.281 U1.4@88.896,92.074 ; JP2.5@81.033,89.02 cw(c81.663,88.39) 81.663,89.281 ; JP2.5@81.033,89.02 cw(c81.663,88.39) 81.663,89.281 ; JP2.5@81.033,89.02 cw(c81.663,88.39) 81.663,89.281 ; JP2.5@81.033,89.02 cw(c81.663,88.39) 81.663,89.281 ; JP2.5@81.033,89.02 cw(c81.663,88.39) 81.663,89.281 ; JP2.5@81.033,89.02 cw(c81.663,88.39) 81.663,89.281 ; JP2.5@81.033,89.02 cw(c81.663,88.39) 81.663,89.281 ; JP2.5@81.033,89.02 cw(c81.663,88.39) 81.663,89.281 ; JP2.5@81.033,89.02 cw(c81.663,88.39) 81.663,89.281 ; JP2.5@81.033,89.02 cw(c81.663,88.39) 81.663,89.281 ; JP2.5@81.033,89.542 ccw(c81.663,90.172) 81.663,89.281 ; JP2.5@81.033,89.542 ccw(c81.663,90.172) 81.663,89.281 ; JP2.5@81.033,89.542 ccw(c81.663,90.172) 81.663,89.281 ; JP2.5@81.033,89.542 ccw(c81.663,90.172) 81.663,89.281 ; JP2.5@81.033,89.542 ccw(c81.663,90.172) 81.663,89.281 ; JP2.5@81.033,89.542 ccw(c81.663,90.172) 81.663,89.281 ; JP2.5@81.033,89.542 ccw(c81.663,90.172) 81.663,89.281 ; JP2.5@81.033,89.542 ccw(c81.663,90.172) 81.663,89.281 ; JP2.5@81.033,89.542 ccw(c81.663,90.172) 81.663,89.281 ; JP2.5@81.033,89.542 ccw(c81.663,90.172) 81.663,89.281 ; JP2.5@81.213,88.84 cw(c82.276,87.777) 82.276,89.281 ; JP2.5@81.213,88.84 cw(c82.276,87.777) 82.276,89.281 ; JP2.5@81.213,88.84 cw(c82.276,87.777) 82.276,89.281 ; JP2.5@81.213,88.84 cw(c82.276,87.777) 82.276,89.281 ; JP2.5@81.213,88.84 cw(c82.276,87.777) 82.276,89.281 ; JP2.5@81.213,88.84 cw(c82.276,87.777) 82.276,89.281 ; JP2.5@81.213,88.84 cw(c82.276,87.777) 82.276,89.281 ; JP2.5@81.213,88.84 cw(c82.276,87.777) 82.276,89.281 ; JP2.5@81.213,88.84 cw(c82.276,87.777) 82.276,89.281 ; JP2.5@81.213,88.84 cw(c82.276,87.777) 82.276,89.281 ; JP2.5@81.213,89.722 ccw(c82.276,90.785) 82.276,89.281 ; JP2.5@81.213,89.722 ccw(c82.276,90.785) 82.276,89.281 ; JP2.5@81.213,89.722 ccw(c82.276,90.785) 82.276,89.281 ; JP2.5@81.213,89.722 ccw(c82.276,90.785) 82.276,89.281 ; JP2.5@81.213,89.722 ccw(c82.276,90.785) 82.276,89.281 ; JP2.5@81.213,89.722 ccw(c82.276,90.785) 82.276,89.281 ; JP2.5@81.213,89.722 ccw(c82.276,90.785) 82.276,89.281 ; JP2.5@81.213,89.722 ccw(c82.276,90.785) 82.276,89.281 ; JP2.5@81.213,89.722 ccw(c82.276,90.785) 82.276,89.281 ; JP2.5@81.213,89.722 ccw(c82.276,90.785) 82.276,89.281 ; 87.679,90.857 ccw(c86.335,92.201) U1.4@88.236,92.201 ; 87.679,90.857 ccw(c86.335,92.201) U1.4@88.236,92.201 ; 87.679,90.857 ccw(c86.335,92.201) U1.4@88.236,92.201 ; 87.679,90.857 ccw(c86.335,92.201) U1.4@88.236,92.201 ; 87.769,90.947 ccw(c86.641,92.074) U1.4@88.236,92.074 ; 87.769,90.947 ccw(c86.641,92.074) U1.4@88.236,92.074 ; 87.769,90.947 ccw(c86.641,92.074) U1.4@88.236,92.074 ; 87.769,90.947 ccw(c86.641,92.074) U1.4@88.236,92.074 ; 87.769,90.947 ccw(c86.641,92.074) U1.4@88.236,92.074 ; 87.769,90.947 ccw(c86.641,92.074) U1.4@88.236,92.074 ; 88.113,91.29 ccw(c87.202,92.201) U1.4@88.49,92.201 ; 88.113,91.29 ccw(c87.202,92.201) U1.4@88.49,92.201 ; 88.113,91.29 ccw(c87.202,92.201) U1.4@88.49,92.201 ; 88.113,91.29 ccw(c87.202,92.201) U1.4@88.49,92.201 ; 88.161,91.339 cw(c88.734,90.766) U1.4@88.734,91.576 ; 88.161,91.339 cw(c88.734,90.766) U1.4@88.734,91.576 ; 88.161,91.339 cw(c88.734,90.766) U1.4@88.734,91.576 ; 88.161,91.339 cw(c88.734,90.766) U1.4@88.734,91.576 ; 88.161,91.339 cw(c88.734,90.766) U1.4@88.734,91.576 ; 88.161,91.339 cw(c88.734,90.766) U1.4@88.734,91.576 ; 88.202,91.38 ccw(c87.509,92.074) U1.4@88.49,92.074 ; 88.202,91.38 ccw(c87.509,92.074) U1.4@88.49,92.074 ; 88.202,91.38 ccw(c87.509,92.074) U1.4@88.49,92.074 ; 88.202,91.38 ccw(c87.509,92.074) U1.4@88.49,92.074 ; 88.202,91.38 ccw(c87.509,92.074) U1.4@88.49,92.074 ; 88.202,91.38 ccw(c87.509,92.074) U1.4@88.49,92.074 ; 88.378,91.555 cw(c88.734,91.199) U1.4@88.734,91.703 ; 88.378,91.555 cw(c88.734,91.199) U1.4@88.734,91.703 ; 88.378,91.555 cw(c88.734,91.199) U1.4@88.734,91.703 ; 88.378,91.555 cw(c88.734,91.199) U1.4@88.734,91.703
NetJP2_6: JP2.6 U1.3 | length 85.2
  Top Layer w0.254: JP2.6@80.772,91.821 86.103,91.821 U1.3@88.896,94.614 ; JP2.6@81.033,91.56 cw(c81.663,90.93) 81.663,91.821 ; JP2.6@81.033,91.56 cw(c81.663,90.93) 81.663,91.821 ; JP2.6@81.033,91.56 cw(c81.663,90.93) 81.663,91.821 ; JP2.6@81.033,91.56 cw(c81.663,90.93) 81.663,91.821 ; JP2.6@81.033,91.56 cw(c81.663,90.93) 81.663,91.821 ; JP2.6@81.033,91.56 cw(c81.663,90.93) 81.663,91.821 ; JP2.6@81.033,91.56 cw(c81.663,90.93) 81.663,91.821 ; JP2.6@81.033,91.56 cw(c81.663,90.93) 81.663,91.821 ; JP2.6@81.033,91.56 cw(c81.663,90.93) 81.663,91.821 ; JP2.6@81.033,91.56 cw(c81.663,90.93) 81.663,91.821 ; JP2.6@81.033,92.082 ccw(c81.663,92.712) 81.663,91.821 ; JP2.6@81.033,92.082 ccw(c81.663,92.712) 81.663,91.821 ; JP2.6@81.033,92.082 ccw(c81.663,92.712) 81.663,91.821 ; JP2.6@81.033,92.082 ccw(c81.663,92.712) 81.663,91.821 ; JP2.6@81.033,92.082 ccw(c81.663,92.712) 81.663,91.821 ; JP2.6@81.033,92.082 ccw(c81.663,92.712) 81.663,91.821 ; JP2.6@81.033,92.082 ccw(c81.663,92.712) 81.663,91.821 ; JP2.6@81.033,92.082 ccw(c81.663,92.712) 81.663,91.821 ; JP2.6@81.033,92.082 ccw(c81.663,92.712) 81.663,91.821 ; JP2.6@81.033,92.082 ccw(c81.663,92.712) 81.663,91.821 ; JP2.6@81.213,91.38 cw(c82.276,90.317) 82.276,91.821 ; JP2.6@81.213,91.38 cw(c82.276,90.317) 82.276,91.821 ; JP2.6@81.213,91.38 cw(c82.276,90.317) 82.276,91.821 ; JP2.6@81.213,91.38 cw(c82.276,90.317) 82.276,91.821 ; JP2.6@81.213,91.38 cw(c82.276,90.317) 82.276,91.821 ; JP2.6@81.213,91.38 cw(c82.276,90.317) 82.276,91.821 ; JP2.6@81.213,91.38 cw(c82.276,90.317) 82.276,91.821 ; JP2.6@81.213,91.38 cw(c82.276,90.317) 82.276,91.821 ; JP2.6@81.213,91.38 cw(c82.276,90.317) 82.276,91.821 ; JP2.6@81.213,91.38 cw(c82.276,90.317) 82.276,91.821 ; JP2.6@81.213,92.262 ccw(c82.276,93.325) 82.276,91.821 ; JP2.6@81.213,92.262 ccw(c82.276,93.325) 82.276,91.821 ; JP2.6@81.213,92.262 ccw(c82.276,93.325) 82.276,91.821 ; JP2.6@81.213,92.262 ccw(c82.276,93.325) 82.276,91.821 ; JP2.6@81.213,92.262 ccw(c82.276,93.325) 82.276,91.821 ; JP2.6@81.213,92.262 ccw(c82.276,93.325) 82.276,91.821 ; JP2.6@81.213,92.262 ccw(c82.276,93.325) 82.276,91.821 ; JP2.6@81.213,92.262 ccw(c82.276,93.325) 82.276,91.821 ; JP2.6@81.213,92.262 ccw(c82.276,93.325) 82.276,91.821 ; JP2.6@81.213,92.262 ccw(c82.276,93.325) 82.276,91.821 ; 87.679,93.397 ccw(c86.335,94.741) U1.3@88.236,94.741 ; 87.679,93.397 ccw(c86.335,94.741) U1.3@88.236,94.741 ; 87.679,93.397 ccw(c86.335,94.741) U1.3@88.236,94.741 ; 87.679,93.397 ccw(c86.335,94.741) U1.3@88.236,94.741 ; 87.769,93.487 cw(c88.896,92.359) U1.3@88.896,93.954 ; 87.769,93.487 ccw(c86.641,94.614) U1.3@88.236,94.614 ; 87.769,93.487 ccw(c86.641,94.614) U1.3@88.236,94.614 ; 87.769,93.487 cw(c88.896,92.359) U1.3@88.896,93.954 ; 87.769,93.487 ccw(c86.641,94.614) U1.3@88.236,94.614 ; 87.769,93.487 cw(c88.896,92.359) U1.3@88.896,93.954 ; 87.769,93.487 ccw(c86.641,94.614) U1.3@88.236,94.614 ; 87.769,93.487 cw(c88.896,92.359) U1.3@88.896,93.954 ; 87.769,93.487 ccw(c86.641,94.614) U1.3@88.236,94.614 ; 87.769,93.487 cw(c88.896,92.359) U1.3@88.896,93.954 ; 87.769,93.487 ccw(c86.641,94.614) U1.3@88.236,94.614 ; 87.769,93.487 cw(c88.896,92.359) U1.3@88.896,93.954 ; 87.986,93.703 cw(c88.896,92.793) U1.3@88.896,94.081 ; 87.986,93.703 cw(c88.896,92.793) U1.3@88.896,94.081 ; 87.986,93.703 cw(c88.896,92.793) U1.3@88.896,94.081 ; 87.986,93.703 cw(c88.896,92.793) U1.3@88.896,94.081 ; 88.113,93.83 ccw(c87.202,94.741) U1.3@88.49,94.741 ; 88.113,93.83 ccw(c87.202,94.741) U1.3@88.49,94.741 ; 88.113,93.83 ccw(c87.202,94.741) U1.3@88.49,94.741 ; 88.113,93.83 ccw(c87.202,94.741) U1.3@88.49,94.741 ; 88.202,93.92 cw(c88.896,93.226) U1.3@88.896,94.208 ; 88.202,93.92 ccw(c87.509,94.614) U1.3@88.49,94.614 ; 88.202,93.92 ccw(c87.509,94.614) U1.3@88.49,94.614 ; 88.202,93.92 cw(c88.896,93.226) U1.3@88.896,94.208 ; 88.202,93.92 ccw(c87.509,94.614) U1.3@88.49,94.614 ; 88.202,93.92 cw(c88.896,93.226) U1.3@88.896,94.208 ; 88.202,93.92 ccw(c87.509,94.614) U1.3@88.49,94.614 ; 88.202,93.92 cw(c88.896,93.226) U1.3@88.896,94.208 ; 88.202,93.92 ccw(c87.509,94.614) U1.3@88.49,94.614 ; 88.202,93.92 cw(c88.896,93.226) U1.3@88.896,94.208 ; 88.202,93.92 ccw(c87.509,94.614) U1.3@88.49,94.614 ; 88.202,93.92 cw(c88.896,93.226) U1.3@88.896,94.208
NetJP2_7: JP2.7 U1.2 | length 85.2
  Top Layer w0.254: JP2.7@80.772,94.361 86.103,94.361 U1.2@88.896,97.154 ; JP2.7@81.033,94.1 cw(c81.663,93.47) 81.663,94.361 ; JP2.7@81.033,94.1 cw(c81.663,93.47) 81.663,94.361 ; JP2.7@81.033,94.1 cw(c81.663,93.47) 81.663,94.361 ; JP2.7@81.033,94.1 cw(c81.663,93.47) 81.663,94.361 ; JP2.7@81.033,94.1 cw(c81.663,93.47) 81.663,94.361 ; JP2.7@81.033,94.1 cw(c81.663,93.47) 81.663,94.361 ; JP2.7@81.033,94.1 cw(c81.663,93.47) 81.663,94.361 ; JP2.7@81.033,94.1 cw(c81.663,93.47) 81.663,94.361 ; JP2.7@81.033,94.1 cw(c81.663,93.47) 81.663,94.361 ; JP2.7@81.033,94.1 cw(c81.663,93.47) 81.663,94.361 ; JP2.7@81.033,94.622 ccw(c81.663,95.252) 81.663,94.361 ; JP2.7@81.033,94.622 ccw(c81.663,95.252) 81.663,94.361 ; JP2.7@81.033,94.622 ccw(c81.663,95.252) 81.663,94.361 ; JP2.7@81.033,94.622 ccw(c81.663,95.252) 81.663,94.361 ; JP2.7@81.033,94.622 ccw(c81.663,95.252) 81.663,94.361 ; JP2.7@81.033,94.622 ccw(c81.663,95.252) 81.663,94.361 ; JP2.7@81.033,94.622 ccw(c81.663,95.252) 81.663,94.361 ; JP2.7@81.033,94.622 ccw(c81.663,95.252) 81.663,94.361 ; JP2.7@81.033,94.622 ccw(c81.663,95.252) 81.663,94.361 ; JP2.7@81.033,94.622 ccw(c81.663,95.252) 81.663,94.361 ; JP2.7@81.213,93.92 cw(c82.276,92.857) 82.276,94.361 ; JP2.7@81.213,93.92 cw(c82.276,92.857) 82.276,94.361 ; JP2.7@81.213,93.92 cw(c82.276,92.857) 82.276,94.361 ; JP2.7@81.213,93.92 cw(c82.276,92.857) 82.276,94.361 ; JP2.7@81.213,93.92 cw(c82.276,92.857) 82.276,94.361 ; JP2.7@81.213,93.92 cw(c82.276,92.857) 82.276,94.361 ; JP2.7@81.213,93.92 cw(c82.276,92.857) 82.276,94.361 ; JP2.7@81.213,93.92 cw(c82.276,92.857) 82.276,94.361 ; JP2.7@81.213,93.92 cw(c82.276,92.857) 82.276,94.361 ; JP2.7@81.213,93.92 cw(c82.276,92.857) 82.276,94.361 ; JP2.7@81.213,94.802 ccw(c82.276,95.865) 82.276,94.361 ; JP2.7@81.213,94.802 ccw(c82.276,95.865) 82.276,94.361 ; JP2.7@81.213,94.802 ccw(c82.276,95.865) 82.276,94.361 ; JP2.7@81.213,94.802 ccw(c82.276,95.865) 82.276,94.361 ; JP2.7@81.213,94.802 ccw(c82.276,95.865) 82.276,94.361 ; JP2.7@81.213,94.802 ccw(c82.276,95.865) 82.276,94.361 ; JP2.7@81.213,94.802 ccw(c82.276,95.865) 82.276,94.361 ; JP2.7@81.213,94.802 ccw(c82.276,95.865) 82.276,94.361 ; JP2.7@81.213,94.802 ccw(c82.276,95.865) 82.276,94.361 ; JP2.7@81.213,94.802 ccw(c82.276,95.865) 82.276,94.361 ; 87.679,95.937 ccw(c86.335,97.281) U1.2@88.236,97.281 ; 87.679,95.937 ccw(c86.335,97.281) U1.2@88.236,97.281 ; 87.679,95.937 ccw(c86.335,97.281) U1.2@88.236,97.281 ; 87.679,95.937 ccw(c86.335,97.281) U1.2@88.236,97.281 ; 87.769,96.027 cw(c88.896,94.899) U1.2@88.896,96.494 ; 87.769,96.027 ccw(c86.641,97.154) U1.2@88.236,97.154 ; 87.769,96.027 ccw(c86.641,97.154) U1.2@88.236,97.154 ; 87.769,96.027 cw(c88.896,94.899) U1.2@88.896,96.494 ; 87.769,96.027 ccw(c86.641,97.154) U1.2@88.236,97.154 ; 87.769,96.027 cw(c88.896,94.899) U1.2@88.896,96.494 ; 87.769,96.027 ccw(c86.641,97.154) U1.2@88.236,97.154 ; 87.769,96.027 cw(c88.896,94.899) U1.2@88.896,96.494 ; 87.769,96.027 ccw(c86.641,97.154) U1.2@88.236,97.154 ; 87.769,96.027 cw(c88.896,94.899) U1.2@88.896,96.494 ; 87.769,96.027 ccw(c86.641,97.154) U1.2@88.236,97.154 ; 87.769,96.027 cw(c88.896,94.899) U1.2@88.896,96.494 ; 87.986,96.243 cw(c88.896,95.333) U1.2@88.896,96.621 ; 87.986,96.243 cw(c88.896,95.333) U1.2@88.896,96.621 ; 87.986,96.243 cw(c88.896,95.333) U1.2@88.896,96.621 ; 87.986,96.243 cw(c88.896,95.333) U1.2@88.896,96.621 ; 88.113,96.37 ccw(c87.202,97.281) U1.2@88.49,97.281 ; 88.113,96.37 ccw(c87.202,97.281) U1.2@88.49,97.281 ; 88.113,96.37 ccw(c87.202,97.281) U1.2@88.49,97.281 ; 88.113,96.37 ccw(c87.202,97.281) U1.2@88.49,97.281 ; 88.202,96.46 cw(c88.896,95.766) U1.2@88.896,96.748 ; 88.202,96.46 ccw(c87.509,97.154) U1.2@88.49,97.154 ; 88.202,96.46 ccw(c87.509,97.154) U1.2@88.49,97.154 ; 88.202,96.46 cw(c88.896,95.766) U1.2@88.896,96.748 ; 88.202,96.46 ccw(c87.509,97.154) U1.2@88.49,97.154 ; 88.202,96.46 cw(c88.896,95.766) U1.2@88.896,96.748 ; 88.202,96.46 ccw(c87.509,97.154) U1.2@88.49,97.154 ; 88.202,96.46 cw(c88.896,95.766) U1.2@88.896,96.748 ; 88.202,96.46 ccw(c87.509,97.154) U1.2@88.49,97.154 ; 88.202,96.46 cw(c88.896,95.766) U1.2@88.896,96.748 ; 88.202,96.46 ccw(c87.509,97.154) U1.2@88.49,97.154 ; 88.202,96.46 cw(c88.896,95.766) U1.2@88.896,96.748